# Altium PCB miner_protector.PcbDoc
Units mm, origin at the board's own origin, x right, y up, seen from the top; angles counter-clockwise.
Board outline 70 x 53 mm, 2 copper layers (Top Layer, Bottom Layer); 17 components, 14 nets, 70 pads, 1 vias.
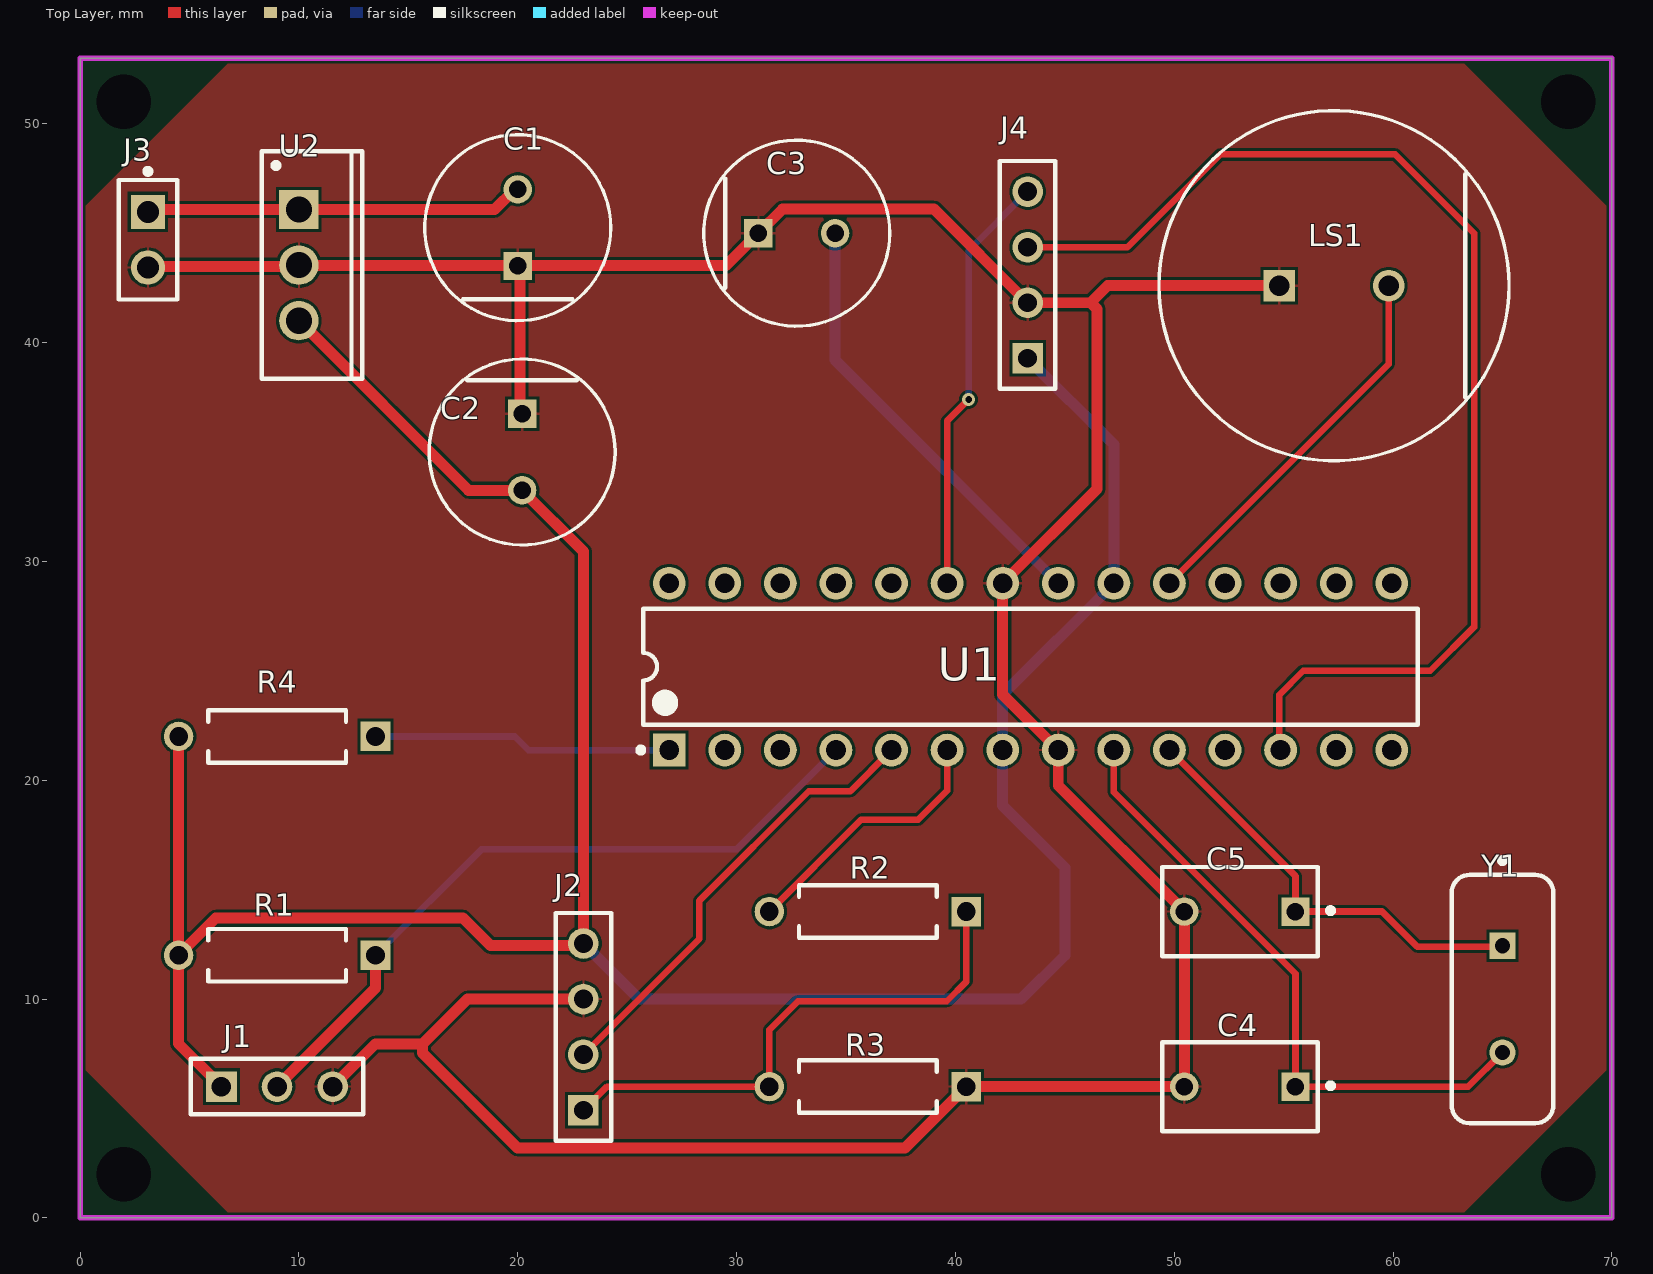
[diagram p0: Top Layer view]
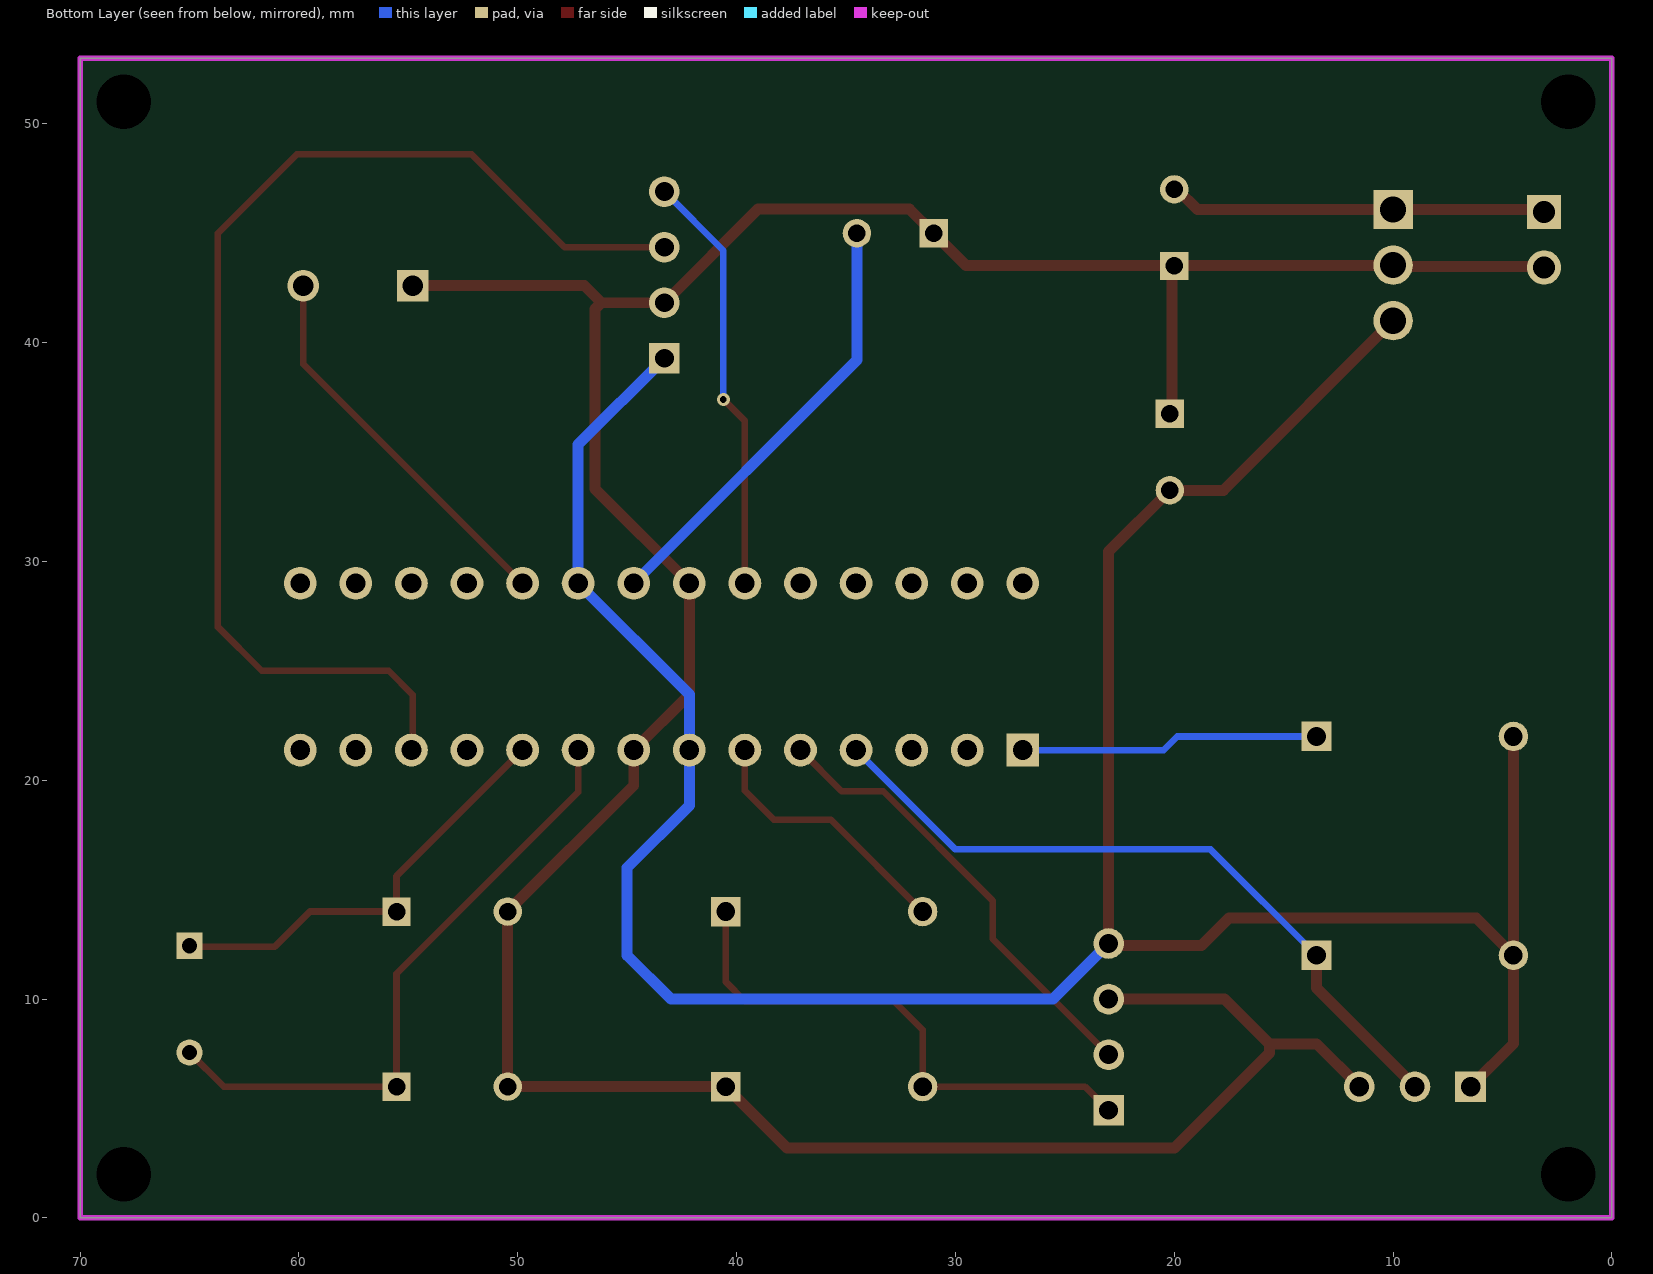
[diagram p1: Bottom Layer view, seen from below]

## Layer stack, top to bottom
Top Solder: solder mask 0.0102, Solder Resist, Dk 3.5
Top Layer: signal copper 0.0356
Dielectric 1: dielectric 0.32, FR-4, Dk 4.8
Bottom Layer: signal copper 0.0356
Bottom Solder: solder mask 0.0102, Solder Resist, Dk 3.5

## Board outline
0,0 70,0 70,53 0,53

## Design rules (kind name [scope] priority, off if disabled: settings)
BoardOutlineClearance [All] p1: gap=0.2 ignorepadtopadclearanceinfootprint=FALSE
Clearance [All] p1: gap=0.127 ignorepadtopadclearanceinfootprint=FALSE except(0.25: Arc-Hole Track-Hole SMDPad-Hole THPad-Hole Via-Hole Fill-Hole Poly-Hole Region-Hole Text-Hole)
ComponentClearance [All] p1: gap=0.127 collisioncheckmode=3 verticalgap=0.127 showdistances=TRUE
DiffPairsRouting [All] p1: maxlimit=0.254 minlimit=0.127 mostfreqgap=0.127 toplayer_minwidth=0.127 toplayer_maxwidth=25.4 toplayer_prefwidth=0.127 bottomlayer_minwidth=0.127 bottomlayer_maxwidth=25.4 bottomlayer_prefwidth=0.127 maxuncoupledlength=12.7
Height [All] p1: minheight=0 maxheight=1816.048 prefheight=12.7
HoleSize [All] p1: absolutevalues=TRUE maxlimit=6.3 minlimit=0.3 maxpercent=80.000 minpercent=20.000
HoleToHoleClearance [All] p1: gap=0.25 allowstackedmicrovias=FALSE
MinimumAnnularRing [All] p1: minimumring=0.076
MinimumSolderMaskSliver [All] p1: minsoldermaskwidth=0
PlaneClearance [All] p1: clearance=0.127
PlaneConnect PlaneConnectPowerPads [InPadClass('PowerPads')] p1: planeconnectstyle=Direct reliefexpansion=0.508 reliefentries=4 reliefconductorwidth=0.254 reliefairgap=0.254
PlaneConnect [All] p2: pad.planeconnectstyle=Relief pad.reliefexpansion=0.3 pad.reliefentries=4 pad.reliefconductorwidth=0.127 pad.reliefairgap=0.127 via.planeconnectstyle=Direct via.reliefexpansion=0.3 via.reliefentries=4 via.reliefconductorwidth=0.127 via.reliefairgap=0.127
PolygonConnect PolygonConnectPowerPads [All vs (InPadClass('PowerPads'))] p1: connectstyle=Direct reliefconductorwidth=0.254 reliefentries=4 polygonreliefangle="90 Angle" airgapwidth=0.254
PolygonConnect [All] p2: thpad.connectstyle=Relief thpad.reliefconductorwidth=0.127 thpad.reliefentries=4 thpad.polygonreliefangle="90 Angle" thpad.airgapwidth=0.127 smdpad.connectstyle=Relief smdpad.reliefconductorwidth=0.127 smdpad.reliefentries=4 smdpad.polygonreliefangle="90 Angle" smdpad.airgapwidth=0.127 via.connectstyle=Direct via.reliefconductorwidth=0.127 via.reliefentries=4 via.polygonreliefangle="90 Angle" via.airgapwidth=0.127
RoutingVias [All] p1: holewidth=0.3 width=0.6 viastyle="Through Hole" minholewidth=0.3 minwidth=0.6 maxholewidth=0.3 maxwidth=0.6
SilkToSilkClearance [All] p1: silktosilkclearance=0
SilkToSolderMaskClearance [IsPad] p1: minsilkscreentomaskgap=0.127 clearancetoexposedcopper=TRUE
SolderMaskExpansion [All] p1: expansion=0.075 istentingtop=FALSE
Width [All] p1: maxlimit=25.4 minlimit=0.127 preferedwidth=0.127 minimp=50.000000 maximp=50.000000 favimp=50.000000
20 further rules are at their usual default settings.

## Components (designator, comment, footprint, x,y, rotation, side; value= is the part's Value field where it differs from the comment)
C1 "EEUFM1H121LB" FP-RAD-TH-D_8_0_5-L_15_1-MFG 20,45.25 r90 top
C2 "EEUFM1H121LB" FP-RAD-TH-D_8_0_5-L_15_1-MFG 20.2,35 r270 top
C3 "EEUFM1H121LB" FP-RAD-TH-D_8_0_5-L_15_1-MFG 32.75,45 r0 top
C4 "C330C105M5U5TA" KEMT-C330C105M5U5TA 53,6 r180 top
C5 "C330C105M5U5TA" KEMT-C330C105M5U5TA 53,14 r180 top
J1 "DHT-22" SMTC-BCS-103-X-S-TE 6.46,6 r0 top
J2 "HC-05 blutooth" SMTC-SLW-104-01-X-S 23,4.92 r90 top
J3 "power in" FP-TSW-102-07-L-S-MFG 3.1,44.7 r270 top
J4 "MQ-07" SMTC-SLW-104-01-X-S 43.3,39.28 r90 top
LS1 "SDC1610M5-01" FP-SDC1610M5-01-MFG 57.3,42.6 r0 top
R1 "MFR-25FBF52-475R" RESA60-630X240 9,12 r180 top value=1K
R2 "MFR-25FBF52-475R" RESA60-630X240 36,14 r180 top value=10K
R3 "MFR-25FBF52-475R" RESA60-630X240 36,6 r180 top value=22K
R4 "MFR-25FBF52-475R" RESA60-630X240 9,22 r180 top value=10K
U1 "ATmega328-PU" 28P3 43.43,25.19 r90 top
U2 "L7805CP" TO220FP 10,43.54 r270 top
Y1 "16MHz" FOX-FOXSLF160-20 65,10 r270 top

## Footprints (in the part's own frame and the unit in brackets; to place one, negate y for a bottom-side part, rotate by r counter-clockwise, add the part's x,y. Pads: shape width x height; smd on the part's side, far side on the other; paste and mask are expansions set on the pad)
28P3 [mm] "28-Pin Plastic Dual In-Line Package (PDIP)"
  rect 1.5x1.5 hole 0.9: 1(-3.81,16.51)
  round 1.5 hole 0.9: 2(-3.81,13.97) 3(-3.81,11.43) 4(-3.81,8.89) 5(-3.81,6.35) 6(-3.81,3.81) 7(-3.81,1.27) 8(-3.81,-1.27) 9(-3.81,-3.81) 10(-3.81,-6.35) 11(-3.81,-8.89) 12(-3.81,-11.43) 13(-3.81,-13.97) 14(-3.81,-16.51) 15(3.81,-16.51) 16(3.81,-13.97) 17(3.81,-11.43) 18(3.81,-8.89) 19(3.81,-6.35) 20(3.81,-3.81) 21(3.81,-1.27) 22(3.81,1.27) 23(3.81,3.81) 24(3.81,6.35) 25(3.81,8.89) 26(3.81,11.43) 27(3.81,13.97) 28(3.81,16.51)
  silkscreen extent -3.93,-17.7 2.65,17.93, body extent -3.6,-17.65 3.6,17.65, height 4.58
FOX-FOXSLF160-20 [mm] "THD, 2-Leads, Body 11.35x4.65mm"
  rect 1.2x1.2 hole 0.7: 1(-2.44,0)
  round 1.2 hole 0.7: 2(2.44,0)
  silkscreen extent -6.45,-2.32 5.68,2.32, body extent -5.67,-2.32 5.68,2.33, height 3.6
FP-RAD-TH-D_8_0_5-L_15_1-MFG [mm]
  rect 1.3x1.3 hole 0.8 paste-1000 mask+0: 1(-1.75,0)
  round 1.3 hole 0.8 paste-1000 mask+0: 2(1.75,0)
  silkscreen extent -4.25,-4.25 4.25,4.25, body extent -4.35,-4.35 4.35,4.35, height 0.25
FP-SDC1610M5-01-MFG [mm]
  rect 1.45x1.45 hole 0.95 paste-1000 mask+0: 1(-2.5,0)
  round 1.45 hole 0.95 paste-1000 mask+0: 2(2.5,0)
  silkscreen extent -8,-8 8,8, body extent -8.1,-8.1 8.1,8.1, height 0.25
FP-TSW-102-07-L-S-MFG [mm]
  rect 1.57x1.57 hole 1.02 paste-1000 mask+0: 1(-1.27,0)
  round 1.57 hole 1.02 paste-1000 mask+0: 2(1.27,0)
  silkscreen extent -3.25,-1.34 2.73,1.34, body extent -2.83,-1.44 2.83,1.44, height 0.25
KEMT-C330C105M5U5TA [mm] "THD, 2-Leads, Body 7.11x4.07mm"
  rect 1.3x1.3 hole 0.8: 1(-2.54,0)
  round 1.3 hole 0.8: 2(2.54,0)
  silkscreen extent -4.27,-2.03 3.55,2.03, body extent -3.55,-2.03 3.55,2.03, height 9.14
RESA60-630X240 [mm] "Axial Resistor, 2-Leads, Dia 2.4mm, Body Length 6.3mm"
  rect 1.35x1.35 hole 0.85: 1(-4.5,0)
  round 1.35 hole 0.85: 2(4.5,0)
  silkscreen extent -3.15,-1.2 3.15,1.2, body extent -4.77,-1.19 4.77,1.2, height 2.4
SMTC-BCS-103-X-S-TE [mm] "Box Connector Socket Strip, 1x3 Pins, Vertical, 2.54mm Pitch, Female"
  rect 1.4x1.4 hole 0.89: 1(0,0)
  round 1.4 hole 0.89: 2(2.54,0) 3(5.08,0)
  silkscreen extent -1.4,-1.27 6.48,1.27, body extent -1.27,-1.27 6.35,1.27, height 7.37
SMTC-SLW-104-01-X-S [mm] "Low Profile Socket Strip, 1x4 Pins, Vertical, 2.54mm Pitch, Female"
  rect 1.4x1.4 hole 0.86: 1(0,0)
  round 1.4 hole 0.86: 2(2.54,0) 3(5.08,0) 4(7.62,0)
  silkscreen extent -1.4,-1.27 9.02,1.27, body extent -1.27,-1.27 8.89,1.27, height 4.57
TO220FP [mm] "TO, Thru-Hole, Vertical, Heatsink Mounted; 3 In-Line Leads; Pitch 2.54 mm"
  rect 1.8x1.8 hole 1.2: 1(-2.54,0)
  round 1.8 hole 1.2: 2(0,0) 3(2.54,0)
  silkscreen extent -5.2,-1.7 5.2,2.9, body extent -5.25,-1.75 5.25,2.95, height 20

## Part data
C1: library part CMP-05427-001049-1, "Aluminum Electrolytic Capacitors (Radial Lead Type) 120uF ±20% 50V", Capacitance=0.33uF, Case/Package=Radial, ESR (Equivalent Series Resistance)=45mR, Max Operating Temperature=105°C, Min Operating Temperature=-40°C, Package Quantity=1000, Ripple Current=1.14A, Tolerance=20%, Voltage Rating=50V, Diameter=8mm, Height=15mm, Height - Seated (Max)=0.65inch, Impedance=45mR, Lead Diameter=0.6mm, Lead Free="Lead Free", Lead Pitch=5mm, Length=15mm, Life (Hours)=3000Hour, Mount="Through Hole", Packaging="Ammo Pack", Radiation Hardening=No, RoHS Compliant=Yes, Series=FM, Termination=Radial, Voltage Rating (DC)=50V
C2 C3: library part CMP-05427-001049-1, "Aluminum Electrolytic Capacitors (Radial Lead Type) 120uF ±20% 50V", Capacitance=0.1uF, Case/Package=Radial, ESR (Equivalent Series Resistance)=45mR, Max Operating Temperature=105°C, Min Operating Temperature=-40°C, Package Quantity=1000, Ripple Current=1.14A, Tolerance=20%, Voltage Rating=50V, Diameter=8mm, Height=15mm, Height - Seated (Max)=0.65inch, Impedance=45mR, Lead Diameter=0.6mm, Lead Free="Lead Free", Lead Pitch=5mm, Length=15mm, Life (Hours)=3000Hour, Mount="Through Hole", Packaging="Ammo Pack", Radiation Hardening=No, RoHS Compliant=Yes, Series=FM, Termination=Radial, Voltage Rating (DC)=50V
C4 C5: library part CMP-2000-06056-1, "Ceramic Capacitor, 1 uF, +/- 20%, 50 V, -10 to 85 degC, 2-Pin THD, RoHS, Bulk", Capacitance=22pF, Manufacturer=Kemet, Operating Temperature=10°C~85°C, Package / Case=Radial, Package Description="2-Pin Through Hole Device, Body 7.11 x 4.07 mm", Ratings=-, Standard Package=250, Temperature Coefficient=Z5U, Tolerance=±20%, Voltage - Rated=50V, Applications=GeneralPurpose, Catalog Drawings=C330(std), Category=Capacitors, Datasheet URL=http://www.kemet.com/Lists/ProductCatalog/Attachments/599/KEM_C1051_GOLDMAX_Z5U.pdf, Datasheet Version=12/2015, Family=CeramicCapacitors, Features=-, Height - Seated (Max)="0.360\"(9.14mm)", Lead Spacing="0.200\"(5.08mm)", Lead Style=Straight, Manufacturer URL=http://www.kemet.com/, Mounting Technology=ThroughHole, Mounting Type=ThroughHole, Online Catalog=GoldenMax™Series, Other Names=399-4390, Package Reference=C330C105M5U5TA, Packaging=Bulk, PCN Design/Specification=C3yySeriesGoldenMaxLeadConfiguration02/Feb/2015, Product Training Modules=CapacitorBasics-TypicalUsesforCapacitors, Series=GoldenMax™, Size / Dimension="0.300\"Lx0.150\"W(7.62mmx3.81mm)", Thickness (Max)=-
J1: library part CMP-1023-00005-1, "Tiger Claw(TM) Pass-Through Socket, Vertical, -55 to 125 degC, 2.54 mm Pitch, 3-Pin, Female, RoHS", Manufacturer=Samtec, PartNumber=BCS-103-L-S-TE, Temperature Range="-55 to 125 degC", ComponentLink1Description="Manufacturer URL", ComponentLink1URL=http://www.samtec.com, ComponentLink2Description=Datasheet, ComponentLink2URL=http://www.samtec.com/documents/webfiles/pdf/BCS.PDF, ComponentLink3Description="Package Specification", ComponentLink3URL=http://www.samtec.com/documents/webfiles/cpdf/BCS-1XX-XXX-X-XX-XXX-MKT.pdf, DatasheetVersion=F-214, Mounting Technology=Through-hole, Orientation=Vertical, PackageDescription="Box Connector Socket Strip", PackageReference=BCS-103-X-S-TE, PackageVersion="BV, 9/1991", Pitch="2.54 mm", RoHS=True
J2 J4: library part CMP-1023-00131-1, "Low Profile Socket Strips, Through-hole, Vertical, -55 to 105 degC, 2.54 mm Pitch, 4-Pin, Female, RoHS", Manufacturer=Samtec, PartNumber=SLW-104-01-T-S, Temperature Range="-55 to 105 degC", ComponentLink1Description="Manufacturer URL", ComponentLink1URL=http://www.samtec.com, ComponentLink2Description=Datasheet, ComponentLink2URL=http://www.samtec.com/documents/webfiles/pdf/SLW.PDF, ComponentLink3Description="Package Specification", ComponentLink3URL=http://www.samtec.com/documents/webfiles/cpdf/SLW-1XX-01-X-X-MKT.pdf, DatasheetVersion=F-214, Mounting Technology=Through-hole, Orientation=Vertical, PackageDescription="Low Profile Socket Strip", PackageReference=SLW-104-01-X-S, PackageVersion="X, 9/1987", Pitch="2.54 mm", RoHS=True
J3: library part CMP-02766-001428-1, "CONN HEADER VERT 2POS 2.54MM", Color=Black, Current Rating=7.6A, Max Operating Temperature=125°C, Max Voltage Rating (AC)=550V, Min Operating Temperature=-55°C, Package Quantity=1, Connector Type="Male Pin", Contact Material=Bronze, Contact Mating Length=0.23inch, Contact Plating=Gold, Contact Type="Male Pin", Depth=2.54mm, Gender=Male, Housing Color=Black, Housing Material=Polyester, Lead Free="Lead Free", Length=5.08mm, Max Current Rating=7.6A, Mount="Through Hole", Number Of Contacts=2, Number of Positions=2, Number Of Rows=1, Orientation=Straight, Packaging=Bulk, Pitch=2.54mm, Radiation Hardening=No, REACH SVHC="No SVHC", RoHS Compliant=Yes, Series=TSW, Termination=Solder, Voltage Rating=550V, Width=2.54mm
LS1: library part CMP-08413-000008-1, "AUDIO MAGNETIC INDICATOR 4-8V TH", Frequency=2.4kHz, Max Operating Temperature=70°C, Max Supply Current=30mA, Min Operating Temperature=-10°C, Nominal Supply Voltage (DC)=5V, Diameter=16mm, Height=10mm, Input Type=DC, Lead Free="Lead Free", Mount="Through Hole", Number of Pins=2, Number of Terminals/Pins=2, Operating Supply Current=30mA, Packaging=Tray, Sensing Method=Magnetic, Series=SDC, Termination="PC Pins", Voltage Rating=5V
R1 R2 R3 R4: library part CMP-009-00056-4, "Axial Resistor, 475 Ohm, +/- 1%, 0.25 W, -55 to 155 degC, 2-Pin THD, RoHS, Bulk", Case/Package=Axial, Manufacturer=Yageo, Max Operating Temperature=155°C, Min Operating Temperature=-55°C, Package Description="2-Pin Axial Lead, Dia 2.4 mm, Body Length 6.3 mm", Package Quantity=200, Package Reference=MFR-25, Power=250mW, Tolerance=1%, Voltage Rating=250V, Datasheet URL=http://www.yageo.com/documents/recent/Yageo%20LR_MFR_2013.pdf, Datasheet Version=Apr-13, Manufacturer URL=http://www.yageo.com/, Mounting Technology=TH, Packaging=Bulk, RoHS Compliant=True
U1: library part CMP-0095-00015-2, "8-bit AVR Microcontroller, 32KB Flash, 1KB EEPROM, 2KB SRAM, 28-pin PDIP, Industrial Grade (-40°C to 85°C)", ComponentLink1Description="Manufacturer URL", ComponentLink1URL=http://www.atmel.com/, ComponentLink2Description="ATmega48A/48PA/88A/88PA/168A/168PA/328/328P Datasheet", ComponentLink2URL=http://www.atmel.com/dyn/resources/prod_documents/8271.pdf, ComponentLink3Description="ATmega48A/48PA/88A/88PA/168A/168PA/328/328P Summary", ComponentLink3URL=http://www.atmel.com/dyn/resources/prod_documents/8271S.pdf, DatasheetVersion="revD, May-2011", PackageDescription="28-lead (0.300\"/7.62mm Wide) Plastic Dual Inline Package (PDIP)", PackageReference=28P3, PackageVersion="revB, Sep-2001", RevisionNote="DatasheetVersion updated. URLs added."
U2: library part CMP-0244-00474-1, "Positive Voltage Regulator, 5V, 3-Pin TO-220FP", ComponentLink1Description="Manufacturer URL", ComponentLink1URL=http://www.st.com, ComponentLink2Description=Datasheet, ComponentLink2URL=http://www.st.com/internet/com/TECHNICAL_RESOURCES/TECHNICAL_LITERATURE/DATASHEET/CD00000444.pdf, DatasheetVersion=16/11/2011, PackageDescription="TO, Thru-Hole, Vertical, Heatsink Mounted; 3 In-Line Leads; Pitch 2.54 mm", PackageReference=TO220FP, PackageVersion=2011
Y1: library part CMP-1749-00003-1, "Resistance Weld Thru-Hole Crystal, 16 MHz, -20 to 70 degC, 2-Pin THD, RoHS, Bulk", Case\Package=Axial, Max Operating Temperature="155 degC", Min Operating Temperature="-55 degC", Package Quantity=200, Power Rating="250 mW", Resistance="221 kohm", Tolerance=1%, Voltage Rating="250 V", ComponentLink1Description="Manufacturer URL", ComponentLink1URL=http://www.foxonline.com/, ComponentLink2Description=Datasheet, ComponentLink2URL=http://www.foxonline.com/pdfs/hc49slf.pdf, DatasheetVersion=Mar-15, Length="0.248 inch", Mount="Through Hole", PackageDescription="2-Pin Through Hole Device, Body 11.35 x 4.65 mm", PackageReference=FOXSLF160-20, Packaging=Bulk, RoHSCompliant=true

## Free pads (board coordinates)
  round 0 hole 2.5 unplated: 6(2,51) 7(68,51) 8(68,2) 9(2,2)

## Via types
v1: diameter 0.6, hole 0.3, Top Layer to Bottom Layer, 1 vias

## Nets (pads, with @x,y where several pads share a name; then routed paths per layer and width w, separated by ;. In a path a pad name is that pad's centre, name@x,y a point inside that pad or via, vN(x,y) a via of type N, cw(c..) or ccw(c..) an arc to the next point about the centre after c; other vN are vias at no path point)
+5: C2.2 J1.1 J2.4 J4.1 R1.2 R4.2 U1.7 U1.20 U2.3 | length 127.9
  Top Layer w0.5: R4.2 R1.2 ; J1.1 4.5,7.96 R1.2 ; U2.3 17.75,33.25 C2.2 23,30.45 J2.4 22.904,12.444 18.756,12.444 17.5,13.7 6.2,13.7 R1.2
  Bottom Layer w0.5: J2.4 25.54,10 43,10 45,12 45,16 42.16,18.84 U1.7 42.16,23.92 U1.20 47.24,35.34 J4.1
GND: C1.1 C2.1 C3.1 C4.2 C5.2 J1.3 J2.3 J3.2 J4.2 LS1.1 R3.1 U1.8 U1.22 U2.2 | length 154.2
  Top Layer w0.5: J3.2 3.155,43.485 9.945,43.485 U2.2 10.02,43.52 C1.1@19.98,43.52 ; J1.3 13.49,7.95 15.65,7.95 ; C2.1 20.1,36.85 20.1,43.4 C1.1@19.98,43.52 ; J2.3 17.7,10 15.65,7.95 ; LS1.1 46.96,42.6 46.18,41.82 ; 15.65,7.95 15.65,7.536 19.986,3.2 37.7,3.2 R3.1 C4.2 C5.2 44.7,19.76 U1.8 42.16,23.92 U1.22 46.473,33.313 46.473,41.527 46.18,41.82 ; C1.1@19.98,43.52 29.52,43.52 C3.1 32.107,46.107 39.013,46.107 J4.2 46.18,41.82
NetC1_2: C1.2 J3.1 U2.1 | length 17.3
  Top Layer w0.5: J3.1 3.21,46.08 U2.1 18.94,46.08 19.86,47 C1.2
NetC3_2: C3.2 U1.21 | length 20.2
  Bottom Layer w0.5: C3.2 34.5,39.2 U1.21
NetC4_1: C4.1 U1.9 Y1.2 | length 28.9
  Top Layer w0.3: U1.9 47.24,19.46 55.54,11.16 C4.1 63.44,6 Y1.2
NetC5_1: C5.1 U1.10 Y1.1 | length 19.9
  Top Layer w0.3: U1.10 55.54,15.62 C5.1 59.495,14 61.095,12.4 64.96,12.4 Y1.1
NetJ1_2: J1.2 R1.1 U1.4 | length 32.8
  Top Layer w0.5: J1.2 13.5,10.5 R1.1
  Bottom Layer w0.3: R1.1 18.338,16.838 29.998,16.838 U1.4
NetJ2_1: J2.1 R2.1 R3.2 | length 24.7
  Top Layer w0.3: J2.1 24.08,6 R3.2 31.5,8.6 32.8,9.9 39.6,9.9 40.5,10.8 R2.1
NetJ2_2: J2.2 U1.5 | length 20.9
  Top Layer w0.3: J2.2 28.3,12.76 28.3,14.5 33.3,19.5 35.2,19.5 U1.5
NetJ4_3: J4.3 U1.12 | length 54.4
  Top Layer w0.3: J4.3 47.86,44.36 52.1,48.6 60.1,48.6 63.7,45 63.7,27 61.7,25 55.9,25 54.8,23.9 54.8,21.44 U1.12
NetJ4_4: J4.4 U1.23 | length 19.4
  Top Layer w0.3: U1.23 39.62,36.42 v1(40.6,37.4)
  Bottom Layer w0.3: v1(40.6,37.4) 40.6,44.2 J4.4
NetLS1_2: LS1.2 U1.19 | length 17.8
  Top Layer w0.3: U1.19 59.8,39.02 LS1.2
NetR2_2: R2.2 U1.6 | length 12.3
  Top Layer w0.3: R2.2 35.7,18.2 38.3,18.2 39.62,19.52 U1.6
NetR4_1: R4.1 U1.1 | length 13.7
  Bottom Layer w0.3: R4.1 19.863,22 20.483,21.38 U1.1
pads on no net: U1.2 U1.3 U1.11 U1.13 U1.14 U1.15 U1.16 U1.17 U1.18 U1.24 U1.25 U1.26 U1.27 U1.28

## Polygon pours and split planes (outlines as drawn)
GND on Top Layer "GND_L01_P000" (solid, pour order 0): 0,46 7,53 63,53 70,46 70,7 63,0 7,0 0,7

## Keep-outs
Keep-Out Layer:
  the board outline again, w0.25